# EAGLE board ESP32 30Pin Large Map (EAGLE 9.6.2)

Size 76.2 x 62.23 mm. Coordinates in mm from the lower left corner, seen from the top.
Outline: 0,0 0,62.23 76.2,62.23 76.2,0 0,0
Copper layers (1*16): Top 0.035mm / dielectric 1.5mm / Bottom 0.035mm
Design rules "default": minimum track width 6mil, minimum drill 0.35mm, track to track 6mil, track to pad 6mil, pad to pad 6mil, via to via 6mil, smd to smd 6mil, copper to edge 40mil, drill to drill 6mil, minimum pad ring 10mil, minimum via ring 8mil, stop-mask expansion 4mil, vias tented up to drill 0mil, thermal gap 10mil

## Footprints (pad centres in the part's own frame; a part is rotated, then mirrored left to right if it is on the bottom)
C050-030X075 = drill 0.813 octagon: 1 -2.54,0; 2 2.54,0
ESP32-DEVKITV1 = drill 1 pad 1.93: 3V3 0,0; D1 30.48,0; D2 7.62,0; D3 27.94,0; D4 10.16,0; D5 17.78,0; D12 7.62,25.4; D13 5.08,25.4; D14 10.16,25.4; D15 5.08,0; D16 12.7,0; D17 15.24,0; D18 20.32,0; D19 22.86,0; D21 25.4,0; D22 33.02,0; D23 35.56,0; D25 17.78,25.4; D26 15.24,25.4; D27 12.7,25.4; D32 22.86,25.4; D33 20.32,25.4; D34 27.94,25.4; D35 25.4,25.4; EN 35.56,25.4; GND 2.54,25.4; GND@1 2.54,0; VIN 0,25.4; VN 30.48,25.4; VP 33.02,25.4
3,0 = hole 3: 0,0
AK500/3-H = drill 1.321 long: 1 -5.004,0; 2 0,0; 3 5.004,0
AK500/2-H = drill 1.321 long: 1 -2.515,0; 2 2.515,0
0207/10 = drill 0.8 pad 1.676 octagon: 1 -5.08,0; 2 5.08,0
TL1105 = drill 1 pad 1.676: 1 -2.25,3.25; 2 2.25,3.25; 3 -2.25,-3.25; 4 2.25,-3.25

## Placement (x,y rotation side)
C1  1nf  [C050-030X075]  57.15,15.24 0 top
E$1  [ESP32-DEVKITV1]  46.99,12.7 90 top
H1  [3,0]  6.35,6.35 0 top
H2  [3,0]  6.35,55.88 0 top
H3  [3,0]  69.85,55.88 0 top
H4  [3,0]  69.85,6.35 0 top
LEDS  [AK500/3-H]  7.62,21.59 90 top
MODE  [AK500/2-H]  7.62,36.83 90 top
R1  470R  [0207/10]  54.61,25.4 90 top
SW1  [TL1105]  57.15,7.62 0 top

## Library data of the parts
C1 R1 = Clean-Kong
E$1 = ESP32-DEVKITV1
H1-H4 = holes
LEDS MODE = con-ptr500
SW1 = switch

## Nets
S$1: E$1.VIN LEDS.1
S$2: E$1.GND LEDS.2
S$3: E$1.D14 LEDS.3
S$4: E$1.D25 R1.1
S$5: C1.2 E$1.GND@1 MODE.1 SW1.2
S$6: C1.1 MODE.2 R1.2 SW1.1

## Tracks (layer width: path | path; a pad name or v marks a point on that pad's centre or on a via)
S$1  (1 unrouted)
S$2  (1 unrouted)
S$3  (1 unrouted)
S$4  (1 unrouted)
S$5  (3 unrouted)
S$6  (3 unrouted)

## Text on the board
tNames: BeaconBox - Large - V1.0 | (c) Copyright 2024 / M.D.Waller / G0PJO